# EAGLE board main (EAGLE 7.2.0)
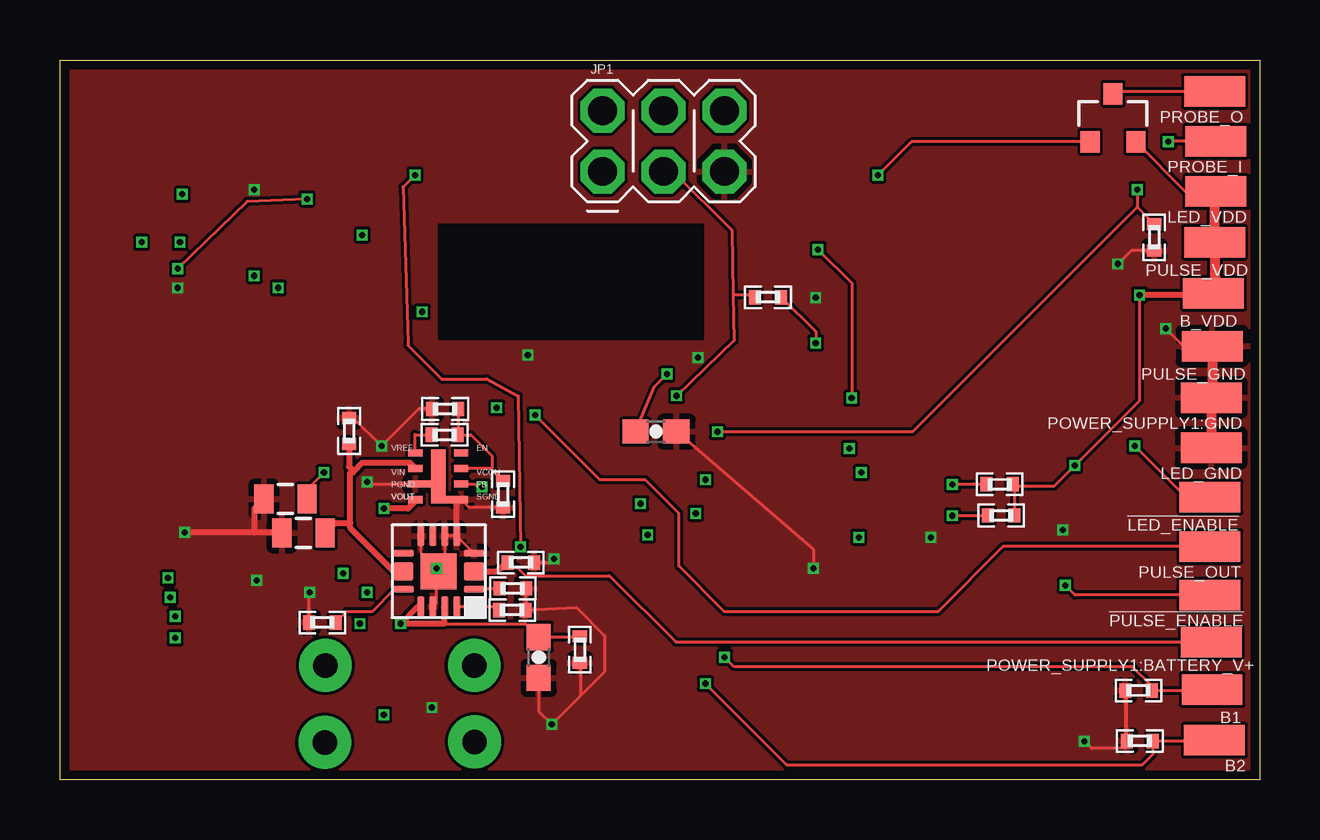
[diagram p0: board, top side]
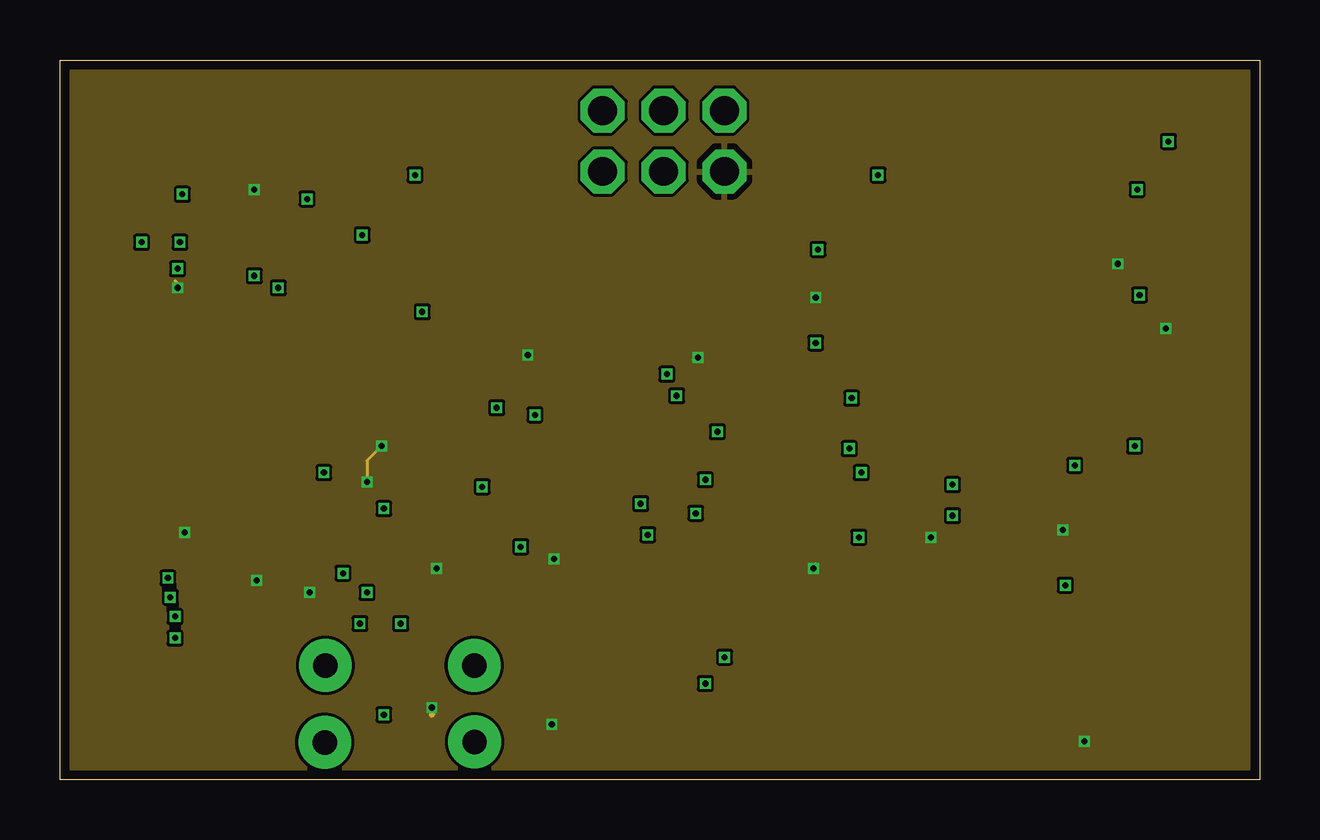
[diagram p1: board, inner layer Route2]
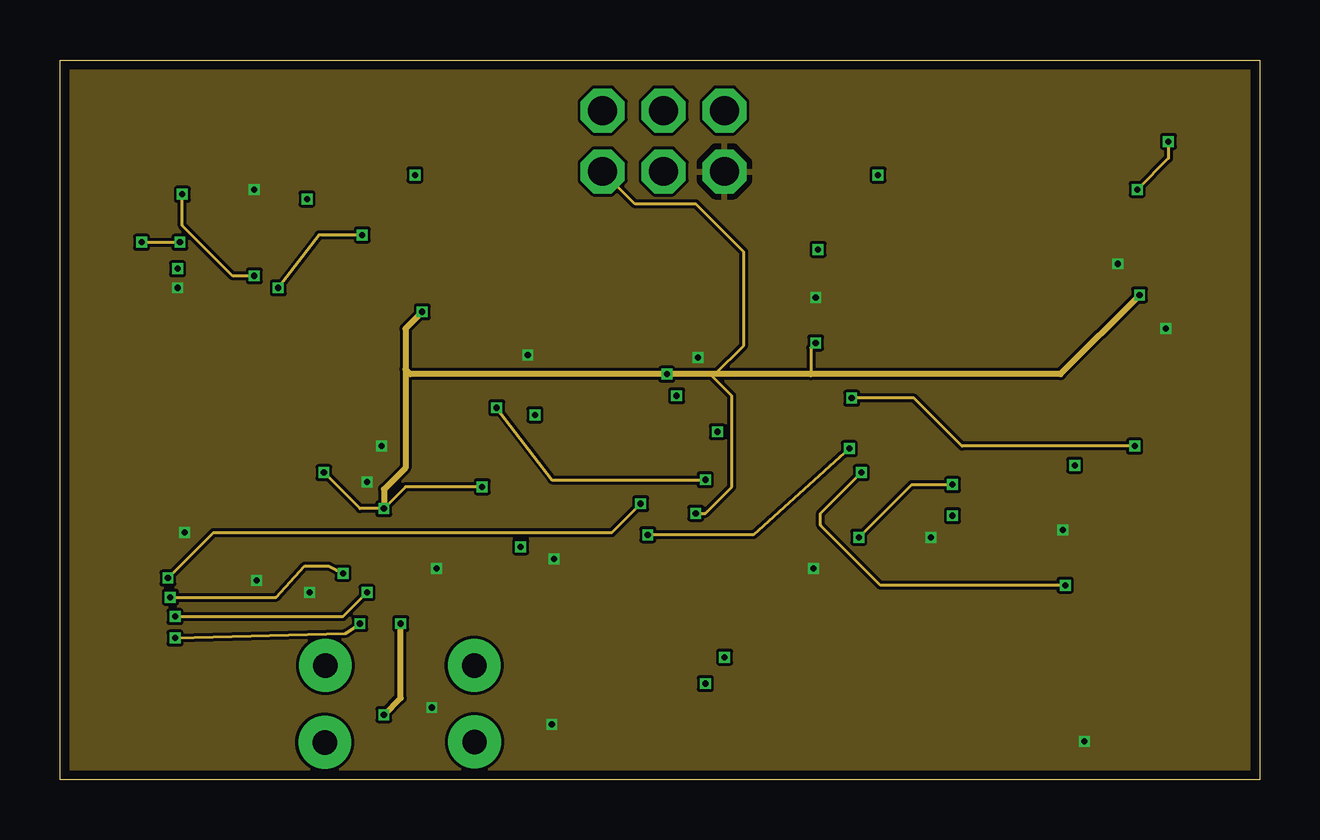
[diagram p2: board, inner layer Route15]
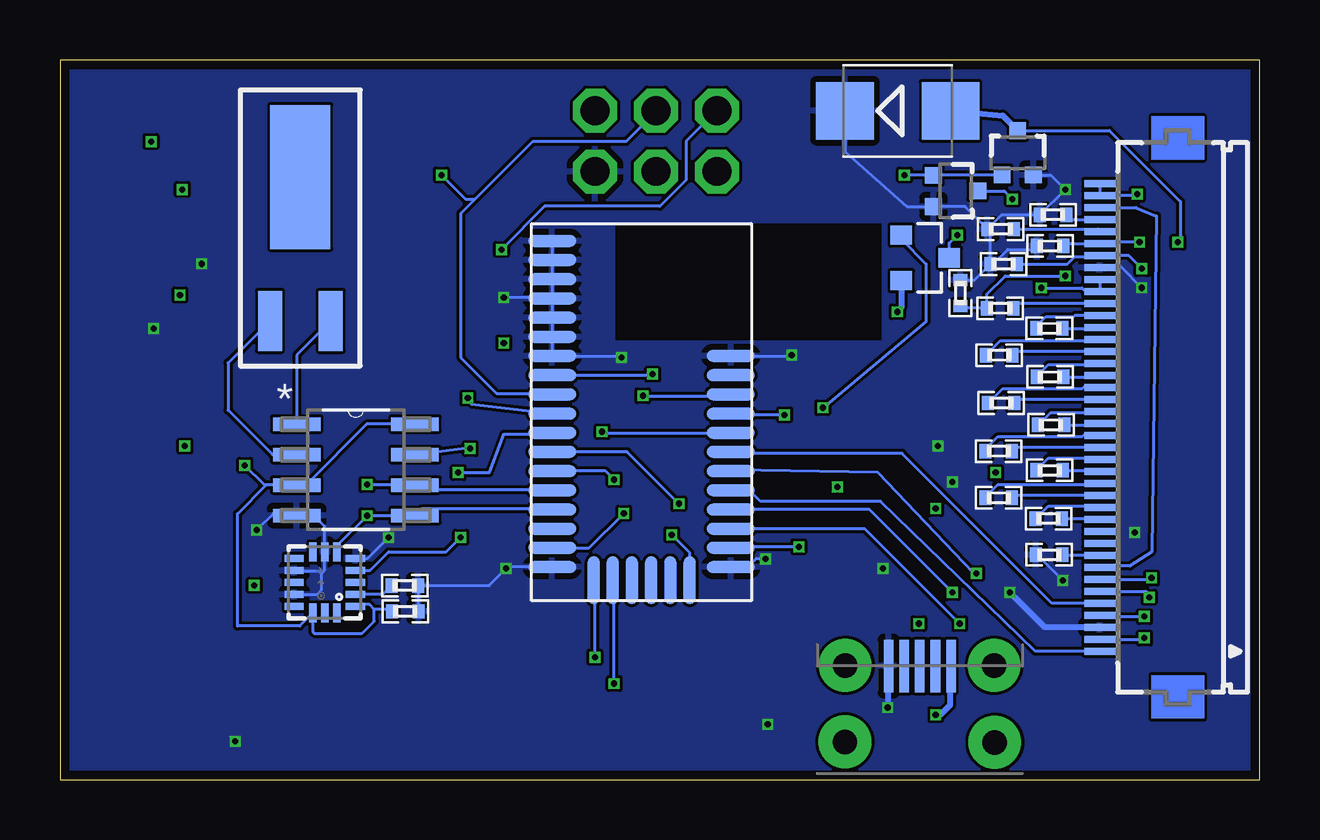
[diagram p3: board, bottom side, seen from below]

Size 50 x 30 mm. Coordinates in mm from the lower left corner, seen from the top.
Outline: 0,0 0,30 50,30 50,0 0,0
Copper layers (1*2*15*16): Top 0.035559375mm / dielectric 0.17018125mm / Route2 0.01778125mm / dielectric 47mil / Route15 0.01778125mm / dielectric 0.17018125mm / Bottom 0.035559375mm
Design rules "OSHPark-4layer": minimum track width 5mil, minimum drill 10mil, track to track 5mil, track to pad 5mil, pad to pad 5mil, via to via 5mil, smd to smd 5mil, copper to edge 15mil, drill to drill 6mil, minimum pad ring 4mil, minimum via ring 4mil, stop-mask expansion 4mil, vias tented up to drill 0mil, thermal gap 10mil

## Footprints (pad centres in the part's own frame; a part is rotated, then mirrored left to right if it is on the bottom)
SMD1,27-2,54 = smd 1.27 x 2.54: 1 0,0
0603-CAP = smd 1.1 x 1: 1 -0.85,0; 2 0.85,0
0402 = smd 0.5 x 0.6: 1 -0.55,0; 2 0.55,0
SMB = smd 2.4 x 2.4: A 2.2,0; C -2.2,0
SOT323 = smd 0.7 x 0.7: 1 -0.65,-0.925; 2 0.65,-0.925; 3 0,0.925
SOT23-3 = smd 0.8 x 0.9: 1 -0.95,-1; 2 0.95,-1; 3 0,1
FH12-40S-0.5SH = smd 0.3 x 1.3: 1 -9.75,3.25; 2 -9.25,3.25; 3 -8.75,3.25; 4 -8.25,3.25; 5 -7.75,3.25; 6 -7.25,3.25; 7 -6.75,3.25; 8 -6.25,3.25; 9 -5.75,3.25; 10 -5.25,3.25; 11 -4.75,3.25; 12 -4.25,3.25; 13 -3.75,3.25; 14 -3.25,3.25; 15 -2.75,3.25; 16 -2.25,3.25; 17 -1.75,3.25; 18 -1.25,3.25; 19 -0.75,3.25; 20 -0.25,3.25; 21 0.25,3.25; 22 0.75,3.25; 23 1.25,3.25; 24 1.75,3.25; 25 2.25,3.25; 26 2.75,3.25; 27 3.25,3.25; 28 3.75,3.25; 29 4.25,3.25; 30 4.75,3.25; 31 5.25,3.25; 32 5.75,3.25; 33 6.25,3.25; 34 6.75,3.25; 35 7.25,3.25; 36 7.75,3.25; 37 8.25,3.25; 38 8.75,3.25; 39 9.25,3.25; 40 9.75,3.25
2X3_POGO = drill 1.2 pad 1.829 octagon: P$1 0,0; P$2 0,2.54; P$3 2.54,0; P$4 2.54,2.54; P$5 5.08,0; P$6 5.08,2.54
0805 = smd 0.8 x 1.2: 1 -0.9,0; 2 0.9,0
MICRO-B-SMT = smd 0.4 x 2.2: 1 -1.3,0; 2 -0.65,0; 3 0,0; 4 0.65,0; 5 1.3,0 | drill 1.016 pad 2.2: P$6 -3.121,3.183; P$7 -3.098,-0.027; P$8 3.122,3.16; P$9 3.108,-0.026
S-PVQFN-N16 = smd 0.85 x 0.28: 1 -0.725,2.225; 4 -0.725,0.725; 9 2.225,0.725; 12 2.225,2.225 | smd 0.85 x 0.78: 2 -0.725,1.475; 10 2.225,1.475 | smd 0.28 x 0.85: 5 0,0; 6 0.5,0; 7 1,0; 8 1.5,0; 13 1.5,2.95; 14 1,2.95; 15 0.5,2.95; 16 0,2.95 | smd 1.5 x 1.5: TH 0.75,1.475
LMZ10500 = smd 0.6 x 0.3: EN 1.9,1.95; FB 1.9,0.65; PGND 0,0.65; PGND1 0.5,0.65; SGND 1.9,0; SGND1 1.425,0; VCON 1.9,1.3; VIN 0,1.3; VOUT 0,0; VREF 0,1.95 | smd 0.6 x 2.25: EN1 0.95,0.975
BLE113-A = smd 2 x 0.5: AVDD -3.725,1.538; DVDD -3.725,-5.662; GND -3.725,7.138; GND@2 -3.725,6.338; GND@3 -3.725,5.537; GND@4 -3.725,4.737; GND@5 -3.725,3.938; GND@6 -3.725,3.138; GND@7 -3.725,2.337; GND@8 -3.725,-6.463; GND@9 3.725,-6.463; GND@10 3.725,2.337; NC -3.725,-4.862; NC@2 3.725,1.538; P0_0 3.725,-0.062; P0_1 3.725,-0.863; P0_2 3.725,-1.663; P0_3 3.725,-2.462; P0_4 3.725,-3.263; P0_5 3.725,-4.062; P0_6 3.725,-4.862; P0_7 3.725,-5.662; P1_6 -3.725,-2.462; P1_7 -3.725,-1.663; P2_0 -3.725,-0.863; P2_1 -3.725,-0.062; P2_2 -3.725,0.738; RESET 3.725,0.738; SCL -3.725,-3.263; SDA -3.725,-4.062 | smd 0.5 x 2: P1_0 2,-7.013; P1_1 1.2,-7.013; P1_2 0.4,-7.013; P1_3 -0.4,-7.013; P1_4 -1.2,-7.013; P1_5 -2,-7.013
QFN-16_0.5MM = smd 0.8 x 0.3: 1 -1.275,1; 2 -1.275,0.5; 3 -1.275,0; 4 -1.275,-0.5; 5 -1.275,-1; 9 1.275,-1; 10 1.275,-0.5; 11 1.275,0; 12 1.275,0.5; 13 1.275,1 | smd 0.3 x 0.8: 6 -0.5,-1.275; 7 0,-1.275; 8 0.5,-1.275; 14 0.5,1.275; 15 0,1.275; 16 -0.5,1.275
SOIC127P600X175-8N = smd 1.981 x 0.559: 1 -2.464,1.905; 2 -2.464,0.635; 3 -2.464,-0.635; 4 -2.464,-1.905; 5 2.464,-1.905; 6 2.464,-0.635; 7 2.464,0.635; 8 2.464,1.905
CRYSTAL_CYL_2X6MM_SMT = smd 2.5 x 1: 1 2.125,1.27; 2 2.125,-1.27 | smd 6 x 2.5: CYLINDER -3.875,0

## Placement (x,y rotation side)
!LED_ENABLE  [SMD1,27-2,54]  47.93,11.78 90 top
!PULSE_ENABLE  [SMD1,27-2,54]  47.93,7.69 90 top
B1  [SMD1,27-2,54]  48.02,3.75 90 top
B2  [SMD1,27-2,54]  48.12,1.64 90 top
B_VDD  [SMD1,27-2,54]  48.08,20.28 90 top
C1  1uF  [0603-CAP]  24.84,14.51 180 top
C2  0.1uF  [0402]  35.63,8.09 180 bottom
C3  4.7uF  [0402]  35.61,7.01 0 bottom
EPAPER_DRIVER1:C1  2.2uF  [0402]  8.77,9.37 0 bottom
EPAPER_DRIVER1:C2  2.2uF  [0402]  8.8,10.88 0 bottom
EPAPER_DRIVER1:C3  2.2uF  [0402]  10.87,11.75 0 bottom
EPAPER_DRIVER1:C4  2.2uF  [0402]  8.75,12.89 0 bottom
EPAPER_DRIVER1:C5  2.2uF  [0402]  10.87,13.69 0 bottom
EPAPER_DRIVER1:C6  2.2uF  [0402]  8.69,14.79 0 bottom
EPAPER_DRIVER1:C7  2.2uF  [0402]  10.77,15.7 0 bottom
EPAPER_DRIVER1:C8  2.2uF  [0402]  8.73,16.79 0 bottom
EPAPER_DRIVER1:C9  2.2uF  [0402]  10.85,17.69 0 bottom
EPAPER_DRIVER1:C10  2.2uF  [0402]  8.76,18.81 0 bottom
EPAPER_DRIVER1:C11  1uF  [0402]  12.47,20.28 270 bottom
EPAPER_DRIVER1:C12  2.2uF  [0402]  10.67,21.49 0 bottom
EPAPER_DRIVER1:C13  2.2uF  [0402]  8.73,22.25 0 bottom
EPAPER_DRIVER1:C14  2.2uF  [0402]  10.79,22.95 0 bottom
EPAPER_DRIVER1:C15  2.2uF  [0402]  8.61,23.55 0 bottom
EPAPER_DRIVER1:D2  B24013F  [SMB]  15.08,27.88 0 bottom
EPAPER_DRIVER1:Q1  MOSFET-NCHANNEL2N7002PW  [SOT323]  10.08,26.13 0 bottom
EPAPER_DRIVER1:Q2  MOSFET-NCHANNEL2N7002PW  [SOT323]  12.67,24.54 270 bottom
EPAPER_DRIVER1:R1  2k  [0402]  10.81,19.65 0 bottom
EPAPER_DRIVER1:U$1  P-CHANNEL-MOSFET  [SOT23-3]  13.93,21.75 270 bottom
EPAPER_DRIVER1:X1  FH12-40S-0.5SH  [FH12-40S-0.5SH]  3.41,15.1 90 bottom
JP1  [2X3_POGO]  22.62,25.35 0 top
LED_GND  [SMD1,27-2,54]  47.98,13.83 90 top
LED_VDD  [SMD1,27-2,54]  48.18,24.52 90 top
POWER_SUPPLY1:BATTERY_V+  [SMD1,27-2,54]  47.99,5.73 90 top
POWER_SUPPLY1:C1  4.7uF  [0402]  19.21,9.05 180 top
POWER_SUPPLY1:C2  10uF  [0805]  9.4,11.7 180 top
POWER_SUPPLY1:C3  10uF  [0805]  10.15,10.28 180 top
POWER_SUPPLY1:C4  4.7uF  [0402]  12.05,14.53 270 top
POWER_SUPPLY1:C6  470pF  [0402]  16.05,15.45 0 top
POWER_SUPPLY1:C7  1uF  [0603-CAP]  19.95,5.09 270 top
POWER_SUPPLY1:GND  [SMD1,27-2,54]  47.99,15.92 90 top
POWER_SUPPLY1:JP1  [MICRO-B-SMT]  14.16,4.73 180 bottom
POWER_SUPPLY1:R1  1.18k  [0402]  10.93,6.55 0 top
POWER_SUPPLY1:R2  1.13k  [0402]  18.85,7.07 180 top
POWER_SUPPLY1:R3  10k  [0402]  18.87,7.97 180 top
POWER_SUPPLY1:R4  10k  [0402]  21.67,5.41 90 top
POWER_SUPPLY1:R5  150k  [0402]  18.47,11.89 90 top
POWER_SUPPLY1:R6  118k  [0402]  16.03,14.37 180 top
POWER_SUPPLY1:U$1  BQ24072  [S-PVQFN-N16]  16.54,10.16 180 top
POWER_SUPPLY1:U$2  LMZ10500  [LMZ10500]  14.82,11.67 0 top
PROBE_I  [SMD1,27-2,54]  48.18,26.61 90 top
PROBE_O  [SMD1,27-2,54]  48.13,28.69 90 top
PULSE_GND  [SMD1,27-2,54]  48.03,18.07 90 top
PULSE_OUT  [SMD1,27-2,54]  47.93,9.71 90 top
PULSE_VDD  [SMD1,27-2,54]  48.13,22.4 90 top
R1  10k  [0402]  29.51,20.11 0 top
R2  4.7k  [0402]  39.17,12.31 0 top
R3  4.7k  [0402]  39.23,11.01 0 top
R4  1M  [0402]  45.61,22.61 270 top
R5  10k  [0402]  44.95,3.71 0 top
R6  10k  [0402]  45.01,1.61 0 top
U1  BLE113-A  [BLE113-A]  25.76,15.32 0 bottom
U2  MMA8452Q  [QFN-16_0.5MM]  38.96,8.22 180 bottom
U3  BQ32000DR  [SOIC127P600X175-8N]  37.67,12.91 0 bottom
U$1  P-CHANNEL-MOSFET  [SOT23-3]  43.89,27.59 0 top
Y1  [CRYSTAL_CYL_2X6MM_SMT]  39.98,21.24 270 bottom

## Library data of the parts
!LED_ENABLE !PULSE_ENABLE B1 B2 B_VDD LED_GND LED_VDD POWER_SUPPLY1:BATTERY_V+ POWER_SUPPLY1:GND PROBE_I PROBE_O PULSE_GND PULSE_OUT PULSE_VDD = wirepad
C1 POWER_SUPPLY1:C2 POWER_SUPPLY1:C3 POWER_SUPPLY1:C7 = SparkFun-Passives
C2 C3 EPAPER_DRIVER1:C1-EPAPER_DRIVER1:C15 EPAPER_DRIVER1:R1 POWER_SUPPLY1:C1 POWER_SUPPLY1:C4 POWER_SUPPLY1:C6 POWER_SUPPLY1:R1-POWER_SUPPLY1:R6 R1-R6 = standardparts
EPAPER_DRIVER1:D2 = diode
EPAPER_DRIVER1:Q1 EPAPER_DRIVER1:Q2 = SparkFun-DiscreteSemi; PROD_ID: TRANS-11151
EPAPER_DRIVER1:U$1 U$1 = GeekAmmo
EPAPER_DRIVER1:X1 = con-hirose; MPN: FH12-40S-0.5SH(55); OC_FARNELL: 1324556; OC_NEWARK: 34M6178
JP1 = SparkFun-Connectors; PROD_ID: HW-11044
POWER_SUPPLY1:JP1 = SparkFun-Connectors; PROD_ID: CONN-09900
POWER_SUPPLY1:U$1 = Simplex-ICs
POWER_SUPPLY1:U$2 = LMZ10500
U1 = sf-bluegiga; ANTENNA: On-module ceramic chip antenna
U2 = SparkFun-Sensors; PROD_ID: IC-10769
U3 = Texas Instruments_By_element14_Batch_1; MPN: BQ32000DR; OC_FARNELL: 1754773; OC_NEWARK: 24R9067; PACKAGE: SOIC-8; SUPPLIER: TEXAS INSTRUMENTS
Y1 = microbuilder

## Nets
3.3V: B_VDD.1 C1.2 C3.1 EPAPER_DRIVER1:U$1.2 JP1.P$1 LED_VDD.1 POWER_SUPPLY1:C2.1 POWER_SUPPLY1:U$2.FB POWER_SUPPLY1:U$2.VOUT PULSE_VDD.1 R1.2 R2.2 R3.2 U1.AVDD U1.DVDD U2.1 U2.14 U3.3 U3.8 U$1.2
!RESET: JP1.P$3 R1.1 U1.RESET
EPAPER_DRIVER1:BORDER: EPAPER_DRIVER1:X1.8 EPAPER_DRIVER1:X1.38
EPAPER_DRIVER1:C11M: EPAPER_DRIVER1:C10.2 EPAPER_DRIVER1:X1.28
EPAPER_DRIVER1:C11P: EPAPER_DRIVER1:C10.1 EPAPER_DRIVER1:X1.29
EPAPER_DRIVER1:C12M: EPAPER_DRIVER1:C9.2 EPAPER_DRIVER1:X1.26
EPAPER_DRIVER1:C12P: EPAPER_DRIVER1:C9.1 EPAPER_DRIVER1:X1.27
EPAPER_DRIVER1:C13M: EPAPER_DRIVER1:C8.2 EPAPER_DRIVER1:X1.24
EPAPER_DRIVER1:C13P: EPAPER_DRIVER1:C8.1 EPAPER_DRIVER1:X1.25
EPAPER_DRIVER1:C14M: EPAPER_DRIVER1:C7.2 EPAPER_DRIVER1:X1.22
EPAPER_DRIVER1:C14P: EPAPER_DRIVER1:C7.1 EPAPER_DRIVER1:X1.23
EPAPER_DRIVER1:C15M: EPAPER_DRIVER1:C6.2 EPAPER_DRIVER1:X1.20
EPAPER_DRIVER1:C15P: EPAPER_DRIVER1:C6.1 EPAPER_DRIVER1:X1.21
EPAPER_DRIVER1:C16M: EPAPER_DRIVER1:C5.2 EPAPER_DRIVER1:X1.18
EPAPER_DRIVER1:C16P: EPAPER_DRIVER1:C5.1 EPAPER_DRIVER1:X1.19
EPAPER_DRIVER1:C21M: EPAPER_DRIVER1:C4.2 EPAPER_DRIVER1:X1.16
EPAPER_DRIVER1:C21P: EPAPER_DRIVER1:C4.1 EPAPER_DRIVER1:X1.17
EPAPER_DRIVER1:C31M: EPAPER_DRIVER1:C3.2 EPAPER_DRIVER1:X1.14
EPAPER_DRIVER1:C31P: EPAPER_DRIVER1:C3.1 EPAPER_DRIVER1:X1.15
EPAPER_DRIVER1:C32M: EPAPER_DRIVER1:C2.2 EPAPER_DRIVER1:X1.12
EPAPER_DRIVER1:C32P: EPAPER_DRIVER1:C2.1 EPAPER_DRIVER1:X1.13
EPAPER_DRIVER1:E_VDD: EPAPER_DRIVER1:U$1.3 EPAPER_DRIVER1:X1.31 EPAPER_DRIVER1:X1.32
EPAPER_DRIVER1:VCL: EPAPER_DRIVER1:C1.2 EPAPER_DRIVER1:X1.9
EPAPER_DRIVER1:VCOM_DRIVER: EPAPER_DRIVER1:R1.2 EPAPER_DRIVER1:X1.30
EPAPER_DRIVER1:VDH: EPAPER_DRIVER1:C14.2 EPAPER_DRIVER1:X1.36
EPAPER_DRIVER1:VDL: EPAPER_DRIVER1:C15.2 EPAPER_DRIVER1:X1.37
EPAPER_DRIVER1:VGH: EPAPER_DRIVER1:C12.2 EPAPER_DRIVER1:Q2.3 EPAPER_DRIVER1:X1.34
EPAPER_DRIVER1:VGL: EPAPER_DRIVER1:C13.2 EPAPER_DRIVER1:D2.A EPAPER_DRIVER1:Q1.3 EPAPER_DRIVER1:X1.35
EPAPER_DRIVER1:VST: EPAPER_DRIVER1:C11.2 EPAPER_DRIVER1:R1.1 EPAPER_DRIVER1:X1.39 EPAPER_DRIVER1:X1.40
GND: C1.1 C2.1 C3.2 EPAPER_DRIVER1:C1.1 EPAPER_DRIVER1:C11.1 EPAPER_DRIVER1:C12.1 EPAPER_DRIVER1:C13.1 EPAPER_DRIVER1:C14.1 EPAPER_DRIVER1:C15.1 EPAPER_DRIVER1:D2.C EPAPER_DRIVER1:Q1.2 EPAPER_DRIVER1:Q2.2 EPAPER_DRIVER1:X1.3 EPAPER_DRIVER1:X1.33 JP1.P$5 LED_GND.1 POWER_SUPPLY1:C1.1 POWER_SUPPLY1:C2.2 POWER_SUPPLY1:C3.2 POWER_SUPPLY1:C4.1 POWER_SUPPLY1:C6.1 POWER_SUPPLY1:C7.2 POWER_SUPPLY1:GND.1 POWER_SUPPLY1:JP1.5 POWER_SUPPLY1:R1.1 POWER_SUPPLY1:R2.1 POWER_SUPPLY1:R3.1 POWER_SUPPLY1:R4.1 POWER_SUPPLY1:R5.1 POWER_SUPPLY1:U$1.4 POWER_SUPPLY1:U$1.5 POWER_SUPPLY1:U$1.6 POWER_SUPPLY1:U$1.8 POWER_SUPPLY1:U$1.14 POWER_SUPPLY1:U$2.PGND POWER_SUPPLY1:U$2.SGND PULSE_GND.1 R4.2 R5.1 R6.1 U1.GND U1.GND@2 U1.GND@3 U1.GND@4 U1.GND@5 U1.GND@6 U1.GND@7 U1.GND@8 U1.GND@9 U1.GND@10 U2.5 U2.7 U2.10 U2.12 U3.4
N$1: U3.2 Y1.2
N$2: C2.2 U2.2
N$3: PROBE_O.1 U$1.3
OSCI: U3.1 Y1.1
P0_0: PULSE_OUT.1 U1.P0_0
P0_1: PROBE_I.1 R4.1 U1.P0_1
P0_2: EPAPER_DRIVER1:X1.5 U1.P0_2
P0_3: EPAPER_DRIVER1:X1.6 U1.P0_3
P0_4: EPAPER_DRIVER1:X1.1 U1.P0_4
P0_5: EPAPER_DRIVER1:X1.4 U1.P0_5
P0_6: EPAPER_DRIVER1:X1.2 U1.P0_6
P0_7: EPAPER_DRIVER1:Q1.1 EPAPER_DRIVER1:Q2.1 U1.P0_7
P1_0: U1.P1_0 U3.7
P1_1: U1.P1_1
P1_2: U1.P1_2
P1_3: U1.P1_3
P1_4: B2.1 R6.2 U1.P1_4
P1_5: B1.1 R5.2 U1.P1_5
P1_6: EPAPER_DRIVER1:U$1.1 U1.P1_6
P1_7: EPAPER_DRIVER1:X1.7 U1.P1_7
P2_0: !PULSE_ENABLE.1 U1.P2_0
P2_1: !LED_ENABLE.1 JP1.P$2 U1.P2_1
P2_2: JP1.P$4 U1.P2_2 U$1.1
POWER_SUPPLY1:!CHG: POWER_SUPPLY1:U$1.9
POWER_SUPPLY1:!PGOOD: POWER_SUPPLY1:U$1.7
POWER_SUPPLY1:BATTERY_V+: POWER_SUPPLY1:BATTERY_V+.1 POWER_SUPPLY1:C1.2 POWER_SUPPLY1:U$1.2
POWER_SUPPLY1:CHG_OUT: POWER_SUPPLY1:C3.1 POWER_SUPPLY1:C4.2 POWER_SUPPLY1:U$1.10 POWER_SUPPLY1:U$2.VIN
POWER_SUPPLY1:N$1: POWER_SUPPLY1:C6.2 POWER_SUPPLY1:R5.2 POWER_SUPPLY1:R6.1 POWER_SUPPLY1:U$2.VCON
POWER_SUPPLY1:N$2: POWER_SUPPLY1:R6.2 POWER_SUPPLY1:U$2.VREF
POWER_SUPPLY1:N$3: POWER_SUPPLY1:R2.2 POWER_SUPPLY1:U$1.16
POWER_SUPPLY1:N$5: POWER_SUPPLY1:R1.2 POWER_SUPPLY1:U$1.12
POWER_SUPPLY1:N$7: POWER_SUPPLY1:R3.2 POWER_SUPPLY1:U$1.1
POWER_SUPPLY1:VCC: POWER_SUPPLY1:C7.1 POWER_SUPPLY1:JP1.1 POWER_SUPPLY1:R4.2 POWER_SUPPLY1:U$1.13 POWER_SUPPLY1:U$1.15
SCL: R2.1 U1.SCL U2.4 U3.6
SDA: R3.1 U1.SDA U2.6 U3.5

## Tracks (layer width: path | path; a pad name or v marks a point on that pad's centre or on a via)
3.3V  (via drill 0.25)
  Top 0.127: v11,12.8 10.3,12.1 POWER_SUPPLY1:C2.1 | POWER_SUPPLY1:U$2.FB 17.28,12.32 17.4,12.2 v17.6,12.2 | U$1.2 46.91,24.52 LED_VDD.1 | C1.2 24.79,16.39 v25.3,16.9 | R1.2 31.5,18.67 v31.5,18.2 | R2.2 39.78,12.25 | 39.78,12.25 R3.2 | v45,20.2 45,15.8 v42.3,13.1 41.45,12.25 39.78,12.25
  Top 0.254: POWER_SUPPLY1:U$2.VOUT 14.82,11.62 14.5,11.3 v13.5,11.3 | 48.13,20.33 48,20.2 v45,20.2
  Top 0.406: LED_VDD.1 48.13,24.47 PULSE_VDD.1 48.13,20.33 B_VDD.1
  Route15 0.127: v11,12.8 12.5,11.3 v13.5,11.3 14.4,12.2 v17.6,12.2 | v25.3,16.9 27.1,16.9 | 27.1,16.9 27.3,16.9 28.5,18.1 28.5,22 26.5,24 23.97,24 JP1.P$1 | v26.5,11.1 26.9,11.1 28,12.2 28,16 27.1,16.9 | v31.5,18.2 31.3,18 31.3,16.9
  Route15 0.254: v15.1,19.5 14.4,18.8 14.4,17.1 | 14.4,17.1 14.4,13 13.5,12.1 v13.5,11.3 | 14.4,17.1 14.6,16.9 v25.3,16.9 31.3,16.9 41.7,16.9 v45,20.2
  Bottom 0.127: U1.AVDD 25.34,16.86 v25.3,16.9 | U1.DVDD 27.94,9.66 v26.5,11.1 | 41.4,12.28 U3.3 40.1,12.31 R2.2 37.22,14.81 U3.8 | 41.4,12.28 41.48,12.28 v42.3,13.1 | 36.9,7.1 36.9,6.6 37.4,6.1 39.4,6.1 39.46,6.16 U2.14 40.01,6.4 42.6,6.4 42.6,11.07 41.4,12.28 | 36.9,7.1 37.1,7.3 37.6,7.3 U2.1 | C3.1 36.25,7.1 36.9,7.1
  Bottom 0.254: EPAPER_DRIVER1:U$1.2 14.93,19.67 v15.1,19.5
!RESET  (via drill 0.25)
  Top 0.127: JP1.P$3 25.55,25.35 28,22.9 28.06,20.19 | 28.06,20.19 28.1,18.3 v25.7,16 | R1.1 28.88,20.19 28.06,20.19
  Bottom 0.127: v25.7,16 22.09,16 U1.RESET
EPAPER_DRIVER1:BORDER
  Bottom 0.127: EPAPER_DRIVER1:X1.38 5.15,23.85 4.3,23.5 4.5,9.5 5.4,8.9 6.61,8.9 EPAPER_DRIVER1:X1.8
EPAPER_DRIVER1:C11M
  Bottom 0.127: EPAPER_DRIVER1:C10.2 6.7,18.81 EPAPER_DRIVER1:X1.28
EPAPER_DRIVER1:C11P
  Bottom 0.127: EPAPER_DRIVER1:X1.29 7.7,19.35 7.75,19.3 8.9,19.3 9.31,18.89 EPAPER_DRIVER1:C10.1
EPAPER_DRIVER1:C12M
  Bottom 0.127: EPAPER_DRIVER1:X1.26 10.14,17.85 EPAPER_DRIVER1:C9.2
EPAPER_DRIVER1:C12P
  Bottom 0.127: EPAPER_DRIVER1:C9.1 10.8,18.3 6.71,18.3 EPAPER_DRIVER1:X1.27
EPAPER_DRIVER1:C13M
  Bottom 0.127: 6.71,16.8 EPAPER_DRIVER1:X1.24 6.72,16.79 EPAPER_DRIVER1:C8.2
EPAPER_DRIVER1:C13P
  Bottom 0.127: EPAPER_DRIVER1:C8.1 9.28,16.82 8.8,17.3 6.71,17.3 EPAPER_DRIVER1:X1.25
EPAPER_DRIVER1:C14M
  Bottom 0.127: EPAPER_DRIVER1:X1.22 9.97,15.85 EPAPER_DRIVER1:C7.2
EPAPER_DRIVER1:C14P
  Bottom 0.127: EPAPER_DRIVER1:C7.1 11.3,15.7 10.7,16.3 7.39,16.3 7.29,16.39 7.2,16.3 6.71,16.3 EPAPER_DRIVER1:X1.23
EPAPER_DRIVER1:C15M
  Bottom 0.127: 7.2,14.77 7.2,14.8 7.21,14.79 | EPAPER_DRIVER1:C6.2 7.21,14.79 | 7.21,14.79 6.72,14.79 EPAPER_DRIVER1:X1.20
EPAPER_DRIVER1:C15P
  Bottom 0.127: 6.66,15.41 EPAPER_DRIVER1:X1.21 6.71,15.3 8.7,15.3 9.21,14.79 EPAPER_DRIVER1:C6.1
EPAPER_DRIVER1:C16M
  Bottom 0.127: EPAPER_DRIVER1:X1.18 10.16,13.85 EPAPER_DRIVER1:C5.2
EPAPER_DRIVER1:C16P
  Bottom 0.127: 6.66,14.39 EPAPER_DRIVER1:X1.19 6.71,14.3 7.2,14.3 7.29,14.39 7.39,14.3 10.9,14.3 11.42,13.78 EPAPER_DRIVER1:C5.1
EPAPER_DRIVER1:C21M
  Bottom 0.127: EPAPER_DRIVER1:C4.2 6.7,12.89 EPAPER_DRIVER1:X1.16
EPAPER_DRIVER1:C21P
  Bottom 0.127: 6.66,13.38 EPAPER_DRIVER1:X1.17 6.71,13.4 8.8,13.4 EPAPER_DRIVER1:C4.1
EPAPER_DRIVER1:C31M
  Bottom 0.127: EPAPER_DRIVER1:X1.14 10.22,11.85 EPAPER_DRIVER1:C3.2
EPAPER_DRIVER1:C31P
  Bottom 0.127: 6.71,12.39 EPAPER_DRIVER1:X1.15 6.71,12.3 10.9,12.3 11.42,11.78 EPAPER_DRIVER1:C3.1
EPAPER_DRIVER1:C32M
  Bottom 0.127: EPAPER_DRIVER1:C2.2 6.69,10.88 EPAPER_DRIVER1:X1.12
EPAPER_DRIVER1:C32P
  Bottom 0.127: EPAPER_DRIVER1:C2.1 9.32,10.88 8.8,11.4 6.71,11.4 EPAPER_DRIVER1:X1.13
EPAPER_DRIVER1:E_VDD  (via drill 0.25)
  Route15 0.127: v12.6,22.7 10.8,22.7 v9.1,20.5
  Bottom 0.127: EPAPER_DRIVER1:X1.32 EPAPER_DRIVER1:X1.31 6.71,20.3 7.2,20.3 7.4,20.5 v9.1,20.5 | EPAPER_DRIVER1:U$1.3 12.93,22.37 v12.6,22.7
EPAPER_DRIVER1:VCL
  Bottom 0.127: EPAPER_DRIVER1:C1.2 6.68,9.37 EPAPER_DRIVER1:X1.9
EPAPER_DRIVER1:VCOM_DRIVER
  Bottom 0.127: EPAPER_DRIVER1:X1.30 10.06,19.85 EPAPER_DRIVER1:R1.2
EPAPER_DRIVER1:VDH
  Bottom 0.127: EPAPER_DRIVER1:C14.2 6.76,22.95 EPAPER_DRIVER1:X1.36
EPAPER_DRIVER1:VDL
  Bottom 0.127: EPAPER_DRIVER1:C15.2 7.86,23.35 EPAPER_DRIVER1:X1.37
EPAPER_DRIVER1:VGH  (via drill 0.25)
  Top 0.127: v10.3,24.2 7.8,24.1 v4.9,21.3
  Bottom 0.127: 6.72,21.79 EPAPER_DRIVER1:X1.34 | EPAPER_DRIVER1:C12.2 8.01,21.49 7.7,21.8 6.71,21.8 EPAPER_DRIVER1:X1.34 | EPAPER_DRIVER1:Q2.3 10.64,24.54 v10.3,24.2 | v4.9,21.3 5.45,21.85 EPAPER_DRIVER1:X1.34
EPAPER_DRIVER1:VGL  (via drill 0.25)
  Route15 0.127: v3.4,22.4 v5,22.4
  Bottom 0.127: EPAPER_DRIVER1:C13.2 8.08,22.35 EPAPER_DRIVER1:X1.35 6.61,22.4 v5,22.4 | EPAPER_DRIVER1:Q1.3 6.25,27.05 3.3,24.1 3.3,22.5 v3.4,22.4
  Bottom 0.254: EPAPER_DRIVER1:D2.A 10.71,27.68 EPAPER_DRIVER1:Q1.3
EPAPER_DRIVER1:VST  (via drill 0.25)
  Route15 0.127: v8.1,21 7.2,21 5.1,23.1 v5.1,24.4
  Bottom 0.127: EPAPER_DRIVER1:X1.40 EPAPER_DRIVER1:X1.39 5.15,24.35 v5.1,24.4 | EPAPER_DRIVER1:C11.2 12.39,19.65 EPAPER_DRIVER1:R1.1 11.36,20.24 10.6,21 v8.1,21
GND  (via drill 0.25)
  Top 0.127: POWER_SUPPLY1:U$1.4 POWER_SUPPLY1:U$1.5 POWER_SUPPLY1:U$1.6 16.04,9.14 v15.7,8.8 | POWER_SUPPLY1:R4.1 21.7,4.83 21.7,3.5 | 21.7,3.5 v20.5,2.3 19.95,2.85 POWER_SUPPLY1:C7.2 | 21.7,3.5 22.7,4.5 22.7,6 21.53,7.17 POWER_SUPPLY1:R2.1 19.4,7.95 POWER_SUPPLY1:R3.1 | POWER_SUPPLY1:U$1.14 15.7,7.37 v15.7,8.8 | POWER_SUPPLY1:U$1.8 15.04,9.46 v15.7,8.8 | POWER_SUPPLY1:C6.1 14.95,15.45 v13.4,13.9 12.22,15.08 POWER_SUPPLY1:C4.1 | v12.8,12.4 12.8,12.32 POWER_SUPPLY1:U$2.PGND 14.84,12.3 15.8,12.3 15.8,11.7 15.83,11.67 POWER_SUPPLY1:U$2.SGND 17.05,11.34 POWER_SUPPLY1:R5.1 | 10.4,6.57 POWER_SUPPLY1:R1.1 10.38,7.78 v10.4,7.8 | POWER_SUPPLY1:C1.1 20.45,9.05 v20.6,9.2 | C1.1 31.4,9.6 v31.4,8.8 | R6.1 44.46,3.65 R5.1 44.4,1.3 43,1.3 v42.7,1.6 | R4.2 44.66,22.06 v44.1,21.5 | PULSE_GND.1 46.83,18.07 v46.1,18.8
  Top 0.254: POWER_SUPPLY1:U$1.5 16.54,11.49 POWER_SUPPLY1:U$2.SGND | POWER_SUPPLY1:C3.2 9.23,10.3 8.1,10.3 | 8.1,10.3 v5.2,10.3 | POWER_SUPPLY1:C2.2 8.1,11.3 8.1,10.3
  Top 0.406: PULSE_GND.1 48.03,15.96 POWER_SUPPLY1:GND.1 LED_GND.1
  Route2 0.127: v8.1,24.6 8.1,24.7 | v4.9,20.5 4.9,20.7 4.8,20.8 | v20.5,2.3 20.4,2.4 | v5.2,10.3 5.1,10.4 | 15.8,8.8 v15.7,8.8 | v13.4,13.9 12.8,13.3 v12.8,12.4 | v8.2,8.3 8.1,8.2 | v19.5,17.7 19.4,17.7 | v26.6,17.6 26.5,17.6 26.4,17.5 | v31.4,8.8 31.4,8.9 31.5,9 | v31.5,20.1 31.5,20 31.6,20 | v42.7,1.6 42.6,1.5 42.6,1.6 | v44.1,21.5 44,21.5 | v46.1,18.8 46,18.9 | v36.3,10.1 36.3,10.2 | v41.8,10.4 41.9,10.4
  Route2 0.254: v15.5,3 15.5,2.7 | v10.4,7.8 10.5,7.7
  Bottom 0.127: EPAPER_DRIVER1:D2.C 17.28,26.18 14.69,23.89 EPAPER_DRIVER1:Q2.2 12.28,23.89 EPAPER_DRIVER1:C14.1 | EPAPER_DRIVER1:C11.1 11.88,20.83 EPAPER_DRIVER1:C12.1 | EPAPER_DRIVER1:C12.1 11.22,22.83 EPAPER_DRIVER1:C14.1 | EPAPER_DRIVER1:C12.1 11.11,21.49 10.5,22.1 9.43,22.1 EPAPER_DRIVER1:C13.1 | EPAPER_DRIVER1:X1.33 6.61,21.4 5.8,21.4 v4.9,20.5 | EPAPER_DRIVER1:C14.1 10.74,23.55 EPAPER_DRIVER1:C15.1 v8.1,24.6 8.71,25.2 EPAPER_DRIVER1:Q1.2 | EPAPER_DRIVER1:C1.1 9.27,9.37 v8.2,8.3 | v20.6,9.2 21,9.2 21.4,8.8 21.46,8.86 U1.GND@9 | U1.GND@10 19.54,17.66 v19.5,17.7 | v26.6,17.6 26.66,17.66 U1.GND@7 U1.GND@6 U1.GND@5 U1.GND@4 U1.GND@3 U1.GND@2 U1.GND 29.48,20.1 | U1.GND@8 31.24,8.86 31.3,8.8 v31.4,8.8 32.11,8.09 C2.1 35.06,8.07 C3.2 | 29.48,20.1 29.4,20.1 | 29.48,20.1 v31.5,20.1 | 37.98,9.22 U2.5 37.18,9.22 v36.3,10.1 | 39.3,10.9 39.4,11 U3.4 | U2.10 40.22,8.7 39,8.7 | 39,8.7 38.96,8.74 U2.7 38.96,10.56 39.3,10.9 | U2.12 39.28,7.72 39.1,7.9 39.1,8.6 39,8.7 | 39.3,10.9 40.7,10.9 40.9,11.1 41.1,11.1 v41.8,10.4
  Bottom 0.254: POWER_SUPPLY1:JP1.5 15.5,4.69 v15.5,3 | EPAPER_DRIVER1:X1.3 8.95,6.35 v10.4,7.8
  pour Route2: -0.1,30.1 50.1,30.1 50.1,-0.1 -0.1,-0.1
  pour Top: 0,30.1 0,0 0.2,-0.2 50,-0.2 50.5,0.3 50.5,29.6 49.7,30.4 0.3,30.4
  pour Route15: -0.1,30.2 -0.1,0.1 0.2,-0.2 50.1,-0.2 50.6,0.3 50.6,29.5 49.6,30.5 0.2,30.5
  pour Bottom: 0.1,30.2 49.9,30.2 50.4,29.7 50.4,0.4 49.9,-0.1 0.2,-0.1 -0.4,0.5 -0.4,29.7
N$1
  Bottom 0.127: Y1.2 43,17.36 43,15.4 41.15,13.54 U3.2
N$2
  Bottom 0.127: C2.2 36.55,7.72 U2.2
N$3
  Top 0.127: U$1.3 43.99,28.69 PROBE_O.1
OSCI
  Bottom 0.127: Y1.1 40.13,17.69 U3.1
P0_0  (via drill 0.25)
  Top 0.127: PULSE_OUT.1 39.31,9.71 36.6,7 27.7,7 25.8,8.9 25.8,11.1 24.4,12.5 22.5,12.5 v19.8,15.2
  Bottom 0.127: v19.8,15.2 21.98,15.2 U1.P0_0
P0_1  (via drill 0.25)
  Top 0.127: PROBE_I.1 v46.21,26.61 v46.2,26.6 | v44.9,24.6 44.9,23.87 | 44.9,23.87 R4.1 | 44.9,23.87 35.53,14.5 v27.4,14.5
  Route15 0.127: v46.2,26.6 46.2,25.9 v44.9,24.6
  Bottom 0.127: v27.4,14.5 27.36,14.46 U1.P0_1
P0_2
  Bottom 0.127: EPAPER_DRIVER1:X1.5 8.65,7.35 14.9,13.6 21.98,13.6 U1.P0_2
P0_3  (via drill 0.25)
  Route15 0.127: v4.6,7.6 9,7.6 10.2,8.9 11.2,8.9 v11.8,8.6
  Bottom 0.127: EPAPER_DRIVER1:X1.6 4.75,7.85 v4.6,7.6 | v11.8,8.6 11.9,8.6 15.9,12.8 21.99,12.9 U1.P0_3
P0_4
  Bottom 0.127: EPAPER_DRIVER1:X1.1 9.35,5.35 15.8,11.6 20.8,11.6 21.2,12 21.98,12 U1.P0_4
P0_5  (via drill 0.25)
  Route15 0.127: v4.8,6.8 11.8,6.8 v12.8,7.8
  Bottom 0.127: EPAPER_DRIVER1:X1.4 6.61,6.8 v4.8,6.8 | v12.8,7.8 16.26,11.26 U1.P0_5
P0_6  (via drill 0.25)
  Route15 0.127: v4.8,5.9 11.9,6.1 v12.5,6.5
  Bottom 0.127: EPAPER_DRIVER1:X1.2 4.85,5.85 v4.8,5.9 | v12.5,6.5 16.46,10.46 U1.P0_6
P0_7  (via drill 0.25)
  Top 0.127: v14.8,25.2 14.3,24.7 14.5,18.2 14.5,18.1 15.9,16.7 17.8,16.7 19.1,16 v19.2,9.7
  Bottom 0.127: EPAPER_DRIVER1:Q1.1 13.18,25.2 EPAPER_DRIVER1:Q2.1 v14.8,25.2 | v19.2,9.7 21.99,9.7 U1.P0_7
P1_0  (via drill 0.25)
  Route15 0.127: v32.9,13.8 28.9,10.2 v24.5,10.2
  Bottom 0.127: U3.7 32.95,13.85 v32.9,13.8 | v24.5,10.2 23.76,9.46 U1.P1_0
P1_4  (via drill 0.25)
  Top 0.127: B2.1 48.09,1.61 R6.2 45.56,1.06 45.1,0.6 30.3,0.6 v26.9,4
  Bottom 0.127: v26.9,4 26.9,8.25 U1.P1_4
P1_5  (via drill 0.25)
  Top 0.127: B1.1 47.97,3.8 47.5,3.8 47.41,3.71 R5.2 45.5,3.9 44.7,4.7 28.1,4.7 v27.7,5.1
  Bottom 0.127: v27.7,5.1 27.7,8.25 U1.P1_5
P1_6  (via drill 0.25)
  Route15 0.127: v18.2,15.5 20.5,12.5 v26.9,12.5
  Bottom 0.127: EPAPER_DRIVER1:U$1.1 14.93,22.53 13.9,21.5 13.9,19.1 v18.2,15.5 | v26.9,12.5 27.26,12.86 U1.P1_6
P1_7  (via drill 0.25)
  Route15 0.127: v24.2,11.5 23,10.3 6.4,10.3 v4.5,8.4
  Bottom 0.127: EPAPER_DRIVER1:X1.7 4.55,8.35 v4.5,8.4 | v24.2,11.5 26.36,13.66 U1.P1_7
P2_0  (via drill 0.25)
  Top 0.127: !PULSE_ENABLE.1 42.31,7.69 v41.9,8.1
  Route15 0.127: v41.9,8.1 34.2,8.1 31.7,10.6 31.7,11.1 v33.4,12.8
  Bottom 0.127: v33.4,12.8 32.1,12.8 31.5,14.4 29.54,14.4 U1.P2_0
P2_1  (via drill 0.25)
  Top 0.127: v31.6,22.1 33,20.7 v33,15.9 | !LED_ENABLE.1 46.92,11.78 v44.8,13.9
  Route15 0.127: v44.8,13.9 37.6,13.9 35.6,15.9 v33,15.9
  Bottom 0.127: JP1.P$2 23.9,26.61 23.9,25 25,23.9 29.8,23.9 v31.6,22.1 | v33,15.9 32.86,15.66 U1.P2_1
P2_2  (via drill 0.25)
  Top 0.127: U$1.1 35.49,26.59 v34.1,25.2
  Bottom 0.127: JP1.P$4 25.16,27.84 26.4,26.6 30.3,26.6 32.7,24.2 | 32.7,24.2 33.3,23.6 33.3,17.6 31.8,16.1 30,16.1 29.96,16.06 U1.P2_2 | v34.1,25.2 33.1,24.2 32.7,24.2
POWER_SUPPLY1:BATTERY_V+
  Top 0.127: 18.45,8.85 19.05,8.85 19.4,8.5 22.9,8.5 25.67,5.73 POWER_SUPPLY1:BATTERY_V+.1
  Top 0.254: POWER_SUPPLY1:U$1.2 18.2,8.69 POWER_SUPPLY1:C1.2 18.45,8.85
POWER_SUPPLY1:CHG_OUT
  Top 0.254: POWER_SUPPLY1:U$1.10 13.91,8.69 12.1,10.5 12.1,10.7 | 12.1,10.7 12.1,12.8 12.2,12.8 12.25,12.85 | POWER_SUPPLY1:C3.1 11.47,10.7 12.1,10.7 | POWER_SUPPLY1:U$2.VIN 14.59,13.2 12.6,13.2 12.25,12.85 | POWER_SUPPLY1:C4.2 12.05,13.05 12.25,12.85
POWER_SUPPLY1:N$1
  Top 0.127: 17.97,12.97 18,13 18,13.5 17.13,14.37 POWER_SUPPLY1:R6.1 16.6,14.39 POWER_SUPPLY1:C6.2 | 17.97,12.97 POWER_SUPPLY1:U$2.VCON | POWER_SUPPLY1:R5.2 17.97,12.97
POWER_SUPPLY1:N$2
  Top 0.127: POWER_SUPPLY1:U$2.VREF 14.8,13.64 14.8,14.4 14.83,14.37 POWER_SUPPLY1:R6.2
POWER_SUPPLY1:N$3
  Top 0.127: POWER_SUPPLY1:U$1.16 18.36,7.21 POWER_SUPPLY1:R2.2
POWER_SUPPLY1:N$5
  Top 0.127: POWER_SUPPLY1:U$1.12 13.94,7.93 13,7 11.93,7 POWER_SUPPLY1:R1.2
POWER_SUPPLY1:N$7
  Top 0.127: POWER_SUPPLY1:U$1.1 17.3,7.97 POWER_SUPPLY1:R3.2
POWER_SUPPLY1:VCC  (via drill 0.25)
  Top 0.127: POWER_SUPPLY1:R4.2 21.65,5.94 POWER_SUPPLY1:C7.1 19.39,6.5 16,6.5
  Top 0.254: POWER_SUPPLY1:U$1.13 14.91,7.21 v14.2,6.5 16,6.5 16,7.17 POWER_SUPPLY1:U$1.15
  Route15 0.254: v13.5,2.7 14.2,3.4 v14.2,6.5
  Bottom 0.254: POWER_SUPPLY1:JP1.1 12.9,4.69 12.9,3.1 13.3,2.7 v13.5,2.7
SCL  (via drill 0.25)
  Top 0.127: R2.1 v37.2,12.3
  Route15 0.127: v33.3,10.1 35.5,12.3 v37.2,12.3
  Bottom 0.127: U1.SCL 30.06,12.06 30.1,12.1 35.03,12.1 U3.6 35.98,12.28 36,12.3 v37.2,12.3 | U2.4 37.08,8.72 36.3,9.5 33.9,9.5 v33.3,10.1
SDA  (via drill 0.25)
  Top 0.127: R3.1 v37.2,11
  Bottom 0.127: U1.SDA 29.53,11.3 34.91,11.3 U3.5 v37.2,11.01 v37.2,11 38.46,9.74 U2.6